# EAGLE board controlunit (EAGLE 4.16)
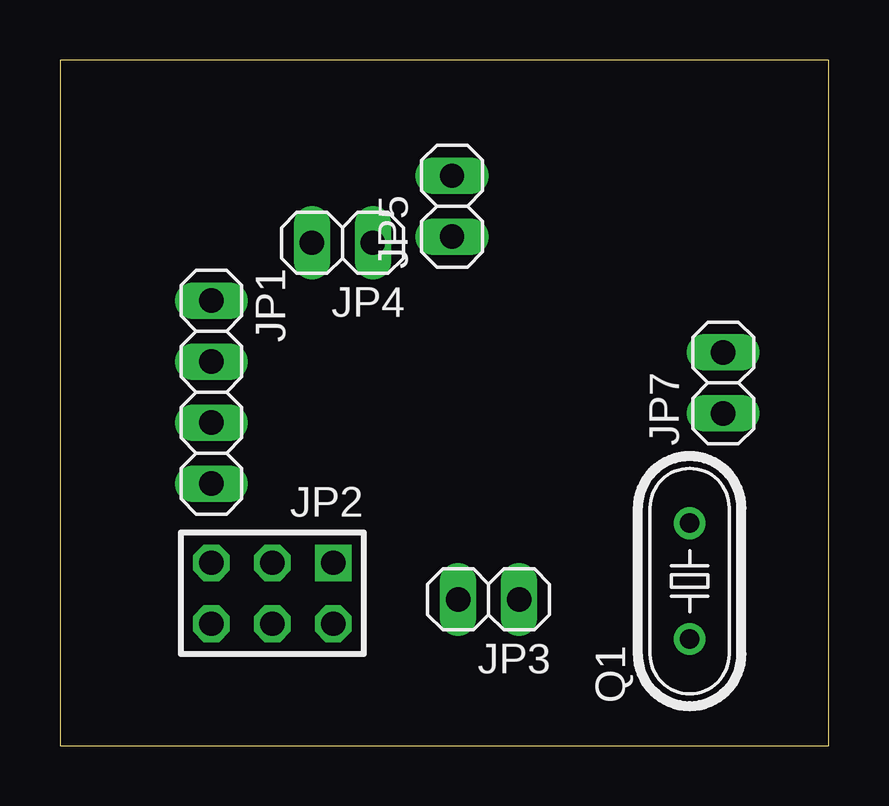
[diagram p0: board, top side]
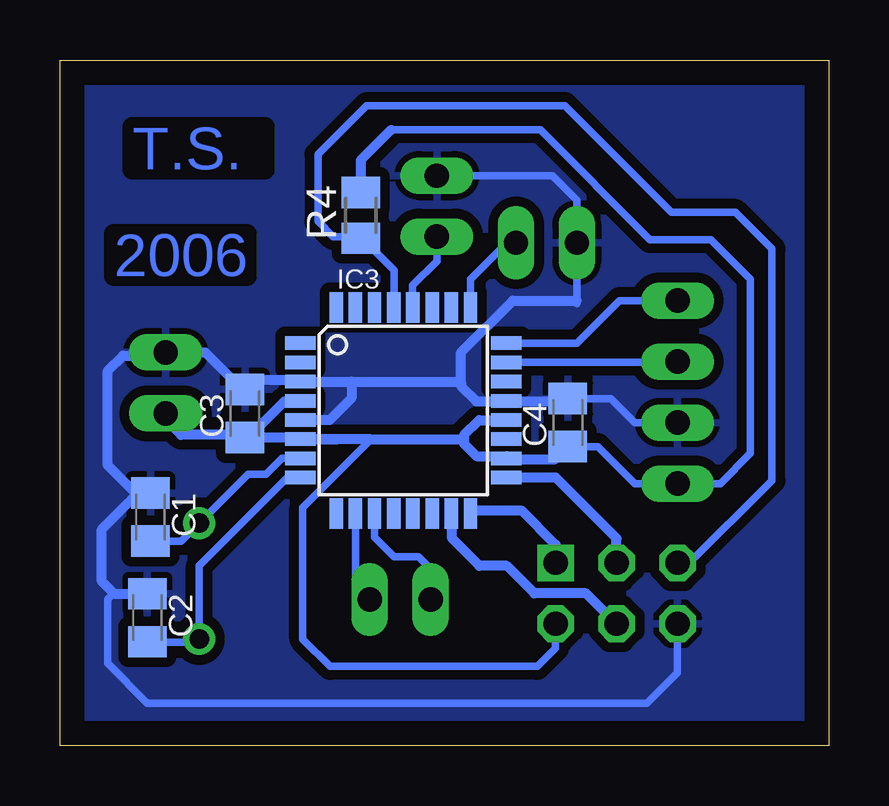
[diagram p1: board, bottom side, seen from below]

Size 32.05 x 28.56 mm. Coordinates in mm from the lower left corner, seen from the top.
Outline: 0,0 32.05,0 32.05,28.56 0,28.56 0,0
Copper layers (1*16): Top 0.035mm / dielectric 1.5mm / Bottom 0.035mm
Design rules "default": minimum track width 10mil, minimum drill 24mil, track to track 8mil, track to pad 8mil, pad to pad 8mil, via to via 8mil, smd to smd 8mil, copper to edge 40mil, drill to drill 8mil, minimum pad ring 10mil, minimum via ring 8mil, stop-mask expansion 4mil, vias tented up to drill 0mil, thermal gap 10mil

## Footprints (pad centres in the part's own frame; a part is rotated, then mirrored left to right if it is on the bottom)
C0805K = smd 1.3 x 1.6: 1 -1,0; 2 1,0
TQFP32-08 = smd 1.27 x 0.559: 1 -4.293,2.8; 2 -4.293,2; 3 -4.293,1.2; 4 -4.293,0.4; 5 -4.293,-0.4; 6 -4.293,-1.2; 7 -4.293,-2; 8 -4.293,-2.8; 17 4.293,-2.8; 18 4.293,-2; 19 4.293,-1.2; 20 4.293,-0.4; 21 4.293,0.4; 22 4.293,1.2; 23 4.293,2; 24 4.293,2.8 | smd 0.559 x 1.27: 9 -2.8,-4.293; 10 -2,-4.293; 11 -1.2,-4.293; 12 -0.4,-4.293; 13 0.4,-4.293; 14 1.2,-4.293; 15 2,-4.293; 16 2.8,-4.293; 25 2.8,4.293; 26 2,4.293; 27 1.2,4.293; 28 0.4,4.293; 29 -0.4,4.293; 30 -1.2,4.293; 31 -2,4.293; 32 -2.8,4.293
1X04 = drill 1.016 long: 1 -3.81,0; 2 -1.27,0; 3 1.27,0; 4 3.81,0
AVR-ISP-6 = drill 1.016 square: 1 -2.54,-1.27 | drill 1.016 octagon: 2 -2.54,1.27; 3 0,-1.27; 4 0,1.27; 5 2.54,-1.27; 6 2.54,1.27
1X02 = drill 1.016 long: 1 -1.27,0; 2 1.27,0
HC49/S = drill 0.813 round: 1 -2.413,0; 2 2.413,0
M0805 = smd 1.3 x 1.6: 1 -0.95,0; 2 0.95,0

## Placement (x,y rotation side)
C1  18pF  [C0805K]  28.28,9.52 270 bottom
C2  18pF  [C0805K]  28.41,5.33 270 bottom
C3  100nF  [C0805K]  24.35,13.84 90 bottom
C4  100nF  [C0805K]  10.88,13.46 90 bottom
IC3  MEGA8-AI  [TQFP32-08]  17.74,13.97 0 bottom
JP1  [1X04]  6.31,14.73 270 top
JP2  AVR-ISP-6  [AVR-ISP-6]  8.85,6.34 180 top
JP3  [1X02]  17.87,6.09 180 top
JP4  [1X02]  11.77,20.95 180 top
JP5  [1X02]  16.34,22.47 90 top
JP7  [1X02]  27.65,15.11 90 top
Q1  12MHz  [HC49/S]  26.25,6.85 90 top
R4  10K  [M0805]  19.52,22.09 90 bottom

## Library data of the parts
C1-C4 R4 = rcl
IC3 = avr
JP1 JP3-JP5 JP7 = pinhead
JP2 = atmel
Q1 = crystal

## Nets
+5V: C3.1 C4.1 IC3.4 IC3.6 IC3.18 IC3.20 JP1.4 JP2.2 JP7.1 R4.2
GND: C1.1 C2.1 C3.2 C4.2 IC3.3 IC3.5 IC3.21 JP1.3 JP2.6 JP4.2 JP5.2 JP7.2
MISO: IC3.16 JP2.1
MOSI: IC3.15 JP2.4
N$1: IC3.24 JP1.1
N$2: IC3.23 JP1.2
N$3: IC3.25 JP4.1
N$5: IC3.28 JP5.1
N$6: IC3.11 JP3.2
N$7: IC3.10 JP3.1
RST: IC3.29 JP2.5 R4.1
SCK: IC3.17 JP2.3
XTAL1: C1.2 IC3.7 Q1.2
XTAL2: C2.2 IC3.8 Q1.1

## Tracks (layer width: path | path; a pad name or v marks a point on that pad's centre or on a via)
+5V
  Bottom 0.305: C4.1 9.63,12.46 8.09,10.92 JP1.4 4.53,10.92 3.26,12.19 3.26,19.43 4.92,21.08 7.46,21.08 12.03,25.65 18.25,25.65 | JP2.2 11.39,4.06 12.15,3.3 20.79,3.3 21.93,4.44 21.93,9.9 19.14,12.7 19.14,12.77
  Bottom 0.406: 13.48,11.93 13.55,11.93 | 13.48,11.93 IC3.18 13.45,12.04 13.42,12.06 14.69,12.06 15.2,12.57 15.2,12.82 | C4.1 11.41,11.93 13.48,11.93 | IC3.20 14.59,13.57 15.2,12.95 15.2,12.82 | 15.2,12.82 15.26,12.77 19.14,12.77 21.88,12.77 21.93,12.82 | 20.47,12.77 IC3.6 21.99,12.77 21.93,12.82 | IC3.4 22.04,14.37 22.06,14.35 22.7,14.35 24.22,12.82 | R4.2 19.52,24.38 18.25,25.65 | 24.35,12.95 C3.1 24.23,12.84 24.22,12.82 | 21.93,12.82 24.22,12.82 | 24.22,12.82 24.35,12.95 | JP7.1 27.77,13.71 27.01,12.95 24.35,12.95
GND
  Bottom 0.305: JP5.2 11.52,23.74 10.5,22.73 JP4.2 | JP4.2 10.63,20.82 | 10.5,18.41 10.5,18.54 JP4.2 | C4.2 9.09,14.46 8.09,13.46 JP1.3 | JP2.6 6.31,3.04 7.58,1.77 28.41,1.77 30.06,3.42 30.06,6.09 29.81,6.34
  Bottom 0.406: 10.5,18.54 13.17,18.54 15.33,16.38 15.33,15.11 | 15.33,15.11 15.33,14.98 14.69,14.35 13.68,14.35 | 13.68,14.35 13.42,14.35 IC3.21 13.47,14.35 13.68,14.35 | C4.2 11,14.35 13.68,14.35 | 15.33,15.11 15.39,15.17 19.9,15.17 | 22.04,15.21 22.06,15.24 23.96,15.24 24.35,14.85 C3.2 24.46,14.84 26,16.38 27.52,16.38 | 22.04,15.21 IC3.3 | 19.9,15.17 21.99,15.17 22.04,15.21 | IC3.5 20.81,13.57 19.9,14.47 19.9,15.17 | 28.79,10.52 28.9,10.52 30.06,11.68 30.06,15.62 29.43,16.25 27.65,16.25 27.52,16.38 | 28.79,10.52 C1.1 | 27.52,16.38 JP7.2 | C2.1 29.79,6.33 29.81,6.34 30.31,6.85 30.31,9.01 28.79,10.54 28.79,10.52
  pour Bottom (isolate 0.406): -2.58,28.7 -2.58,-1.02 33.87,-1.02 33.87,28.44
MISO
  Bottom 0.406: JP2.1 11.39,8.38 12.79,9.77 14.95,9.77 14.94,9.77 IC3.16
MOSI
  Bottom 0.406: JP2.4 10.12,6.34 12.28,6.34 13.42,7.49 14.57,7.49 15.71,8.63 15.71,9.7 | 15.71,9.7 15.71,9.77 | 15.71,9.7 IC3.15
N$1
  Bottom 0.305: IC3.24 10.5,16.77 8.73,18.54 JP1.1 6.18,18.66
N$2
  Bottom 0.305: IC3.23 6.34,15.97 JP1.2
N$3
  Bottom 0.305: JP4.1 13.42,20.95 14.95,19.43 14.95,18.03 14.94,18.04 IC3.25
N$5
  Bottom 0.305: JP5.1 16.34,20.19 17.36,19.17 17.36,18.03 17.34,18.05 IC3.28
N$6
  Bottom 0.305: IC3.11 18.94,8.69 18.12,7.87 17.11,7.87 16.6,7.36 JP3.2
N$7
  Bottom 0.305: IC3.10 19.74,6.69 JP3.1
RST
  Bottom 0.305: 18.12,18.28 18.12,19.81 19.52,21.2 R4.1 19.45,21.14 19.39,21.2 20.66,21.2 21.3,21.84 21.3,24.63 19.27,26.66 11.01,26.66 6.57,22.22 3.9,22.22 2.38,20.7 2.38,11.04 5.93,7.49 6.31,7.49 JP2.5
  Bottom 0.406: 18.12,18.28 IC3.29
SCK
  Bottom 0.406: IC3.17 11.39,11.17 8.85,8.63 JP2.3
XTAL1
  Bottom 0.305: IC3.7 22.79,11.97 23.46,11.3 24.22,11.3 Q1.2 27.01,8.5 28.28,8.5 C1.2
XTAL2
  Bottom 0.305: IC3.8 22.04,11.17 22.57,11.17 26.25,7.49 Q1.1 26.38,4.31 28.39,4.31 C2.2

## Text on the board
Bottom: T.S. | 2006